# Altium PCB PCB.PcbDoc
Units mm, origin at the board's own origin, x right, y up, seen from the top; angles counter-clockwise.
Board outline 48.53 x 25.4 mm, 2 copper layers (Top, Bottom), stack 1.57 mm thick; 45 components, 44 nets, 183 pads, 5 vias.
Unrouted connection lines stored in the file: 116.
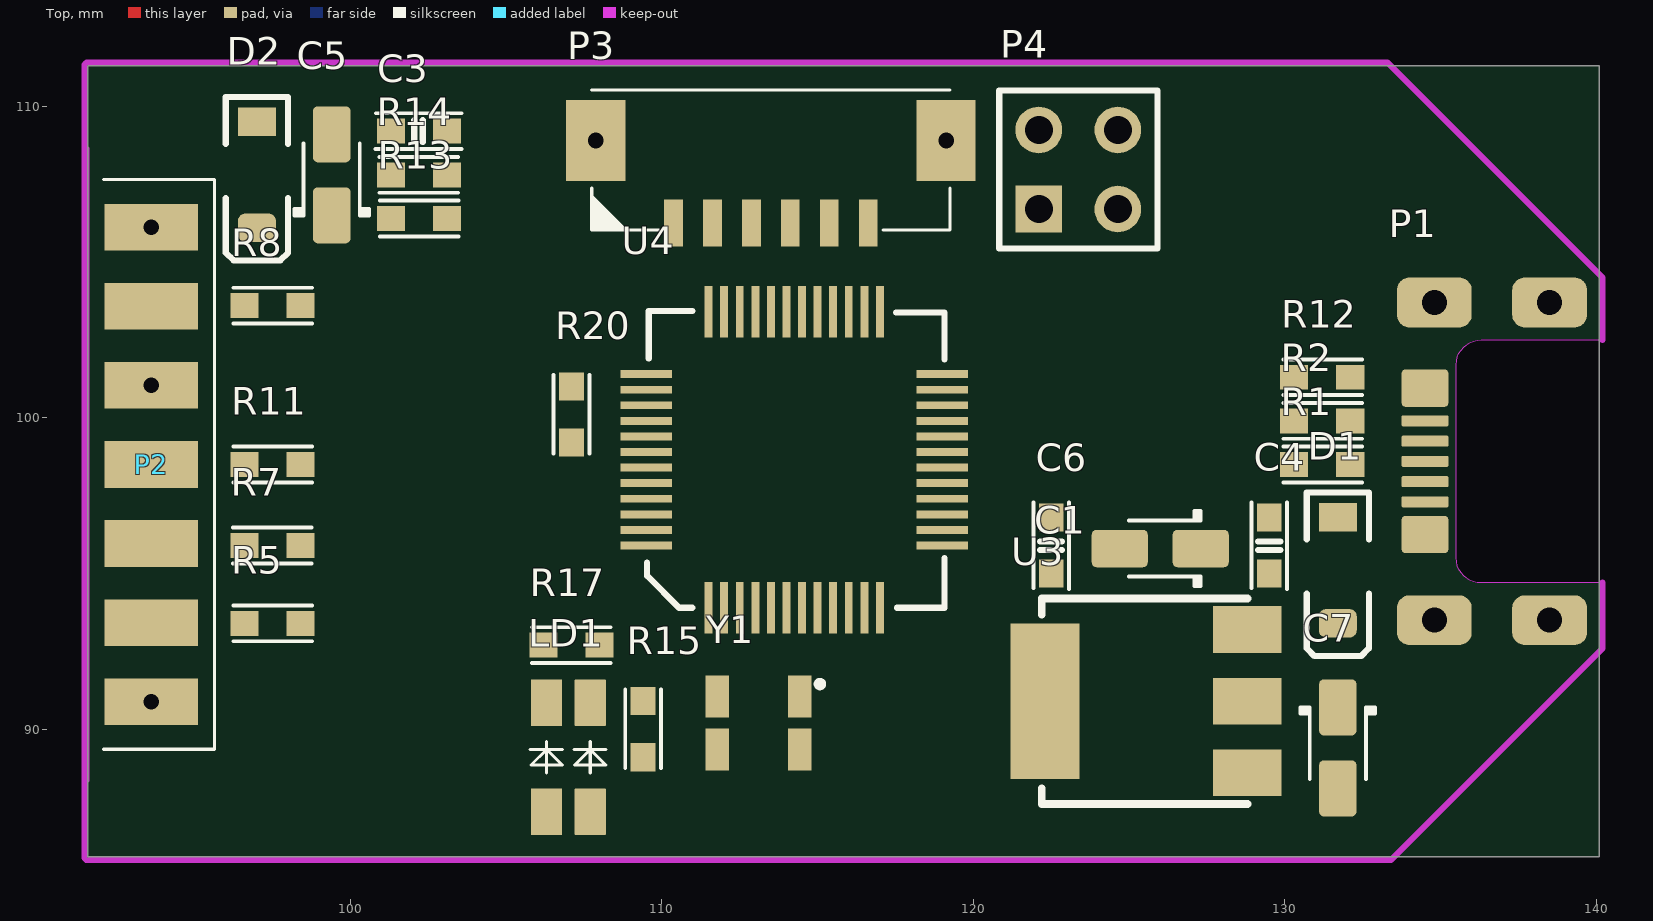
[diagram p0: Top view]
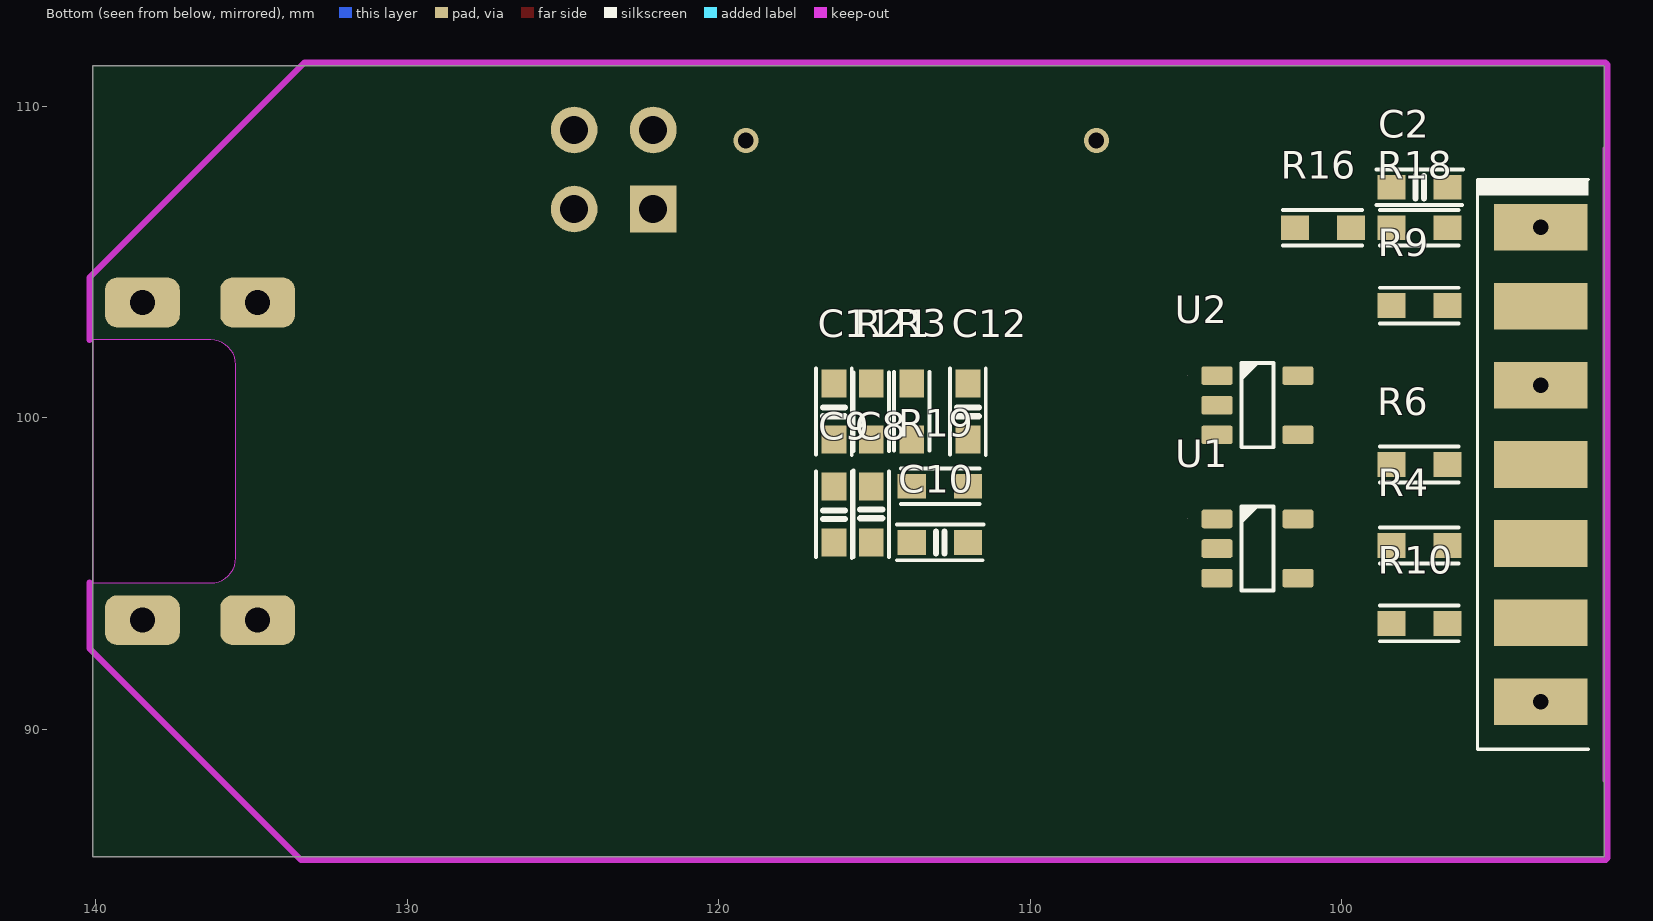
[diagram p1: Bottom view, seen from below]

## Layer stack, top to bottom
Top Solder: solder mask 0.01, Solder Resist, Dk 3.5
Top: signal copper 0.035
Dielectric 1: dielectric 1.5, FR-4, Dk 4.8
Bottom: signal copper 0.035
Bottom Solder: solder mask 0.01, Solder Resist, Dk 3.5

## Board outline
91.568,85.9 91.568,111.3 140.1,111.3 140.1,85.9

## Design rules (kind name [scope] priority, off if disabled: settings)
Clearance [All] p1: gap=0.2
FanoutControl Fanout_BGA [IsBGA] p1: bgadir=Out bgaviamode=Centered fanoutstyle=Auto fanoutdirection=InOnly viagrid=0.025 // Fanout_BGA (Default Rule)
PolygonConnect [All] p1: connectstyle=Relief reliefconductorwidth=0.254 reliefentries=4 polygonreliefangle="90 Angle" airgapwidth=0.254
RoutingVias [All] p1: holewidth=0.7 width=1.27 viastyle="Through Hole" minholewidth=0.3 minwidth=0.8 maxholewidth=0.5 maxwidth=1
SolderMaskExpansion [All] p1: expansion=0.102
Width [All] p1: maxlimit=0.4 minlimit=0.2 preferedwidth=0.3
29 further rules are at their usual default settings.

## Components (designator, comment, footprint, x,y, rotation, side; value= is the part's Value field where it differs from the comment)
C1 "22u" CAPMP3216X180N 126,95.8 r180 top
C2 "0u1" C0603C 98.4,107.4 r180 bottom
C3 "0u1" C0603C 103.1,109.2 r180 top
C4 "0u1" C0603C 129.5,96.8 r270 top
C5 "22u" CAPMP3216X180N 99.4,107.8 r90 top
C6 "0u1" C0603C 122.5,96.8 r270 top
C7 "22u" CAPMP3216X180N 131.7,89.4 r270 top
C8 "0u1" C0603C 115.1,96 r90 bottom
C9 "0u1" C0603C 116.3,97.8 r270 bottom
C10 "0u1" C0603C 113.8,96 r180 bottom
C11 "0u1" C0603C 116.3,101.1 r270 bottom
C12 "0u1" C0603C 112,101.1 r270 bottom
D1 "MBR0520" SOD-123 131.7,95.1 r270 top
D2 "MBR0520" SOD-123 97,107.8 r270 top
LD1 "FYLS-1210 EGW" FYLS-1210 107,89.1 r90 top
P1 "47346-0001" USB_Micro-B_FCI_SMD 140.1,98.6 r90 top
P2 "Header 7X2" IDC-14MS-EDGE 93.6,98.5 r270 top
P3 "Header 6" CONN-1.25MM6P 113.5,108.9 r0 top
P4 "Header 4" HDR2X2 122.1,106.7 r90 top
R1 "22R" C0603R 132.1,98.5 r180 top
R2 "22R" C0603R 132.1,99.9 r180 top
R3 "10R" C0603R 113.8,101.1 r270 bottom
R4 "22R" C0603R 98.4,95.9 r180 bottom
R5 "22R" C0603R 98.4,93.4 r180 top
R6 "22R" C0603R 98.4,98.5 r180 bottom
R7 "22R" C0603R 96.6,95.9 r0 top
R8 "22R" C0603R 98.4,103.6 r180 top
R9 "22R" C0603R 98.4,103.6 r180 bottom
R10 "22R" C0603R 98.4,93.4 r180 bottom
R11 "22R" C0603R 98.4,98.5 r180 top
R12 "1.5k" C0603R 132.1,101.3 r180 top
R13 "4.7k" C0603R 103.1,106.4 r180 top
R14 "4.7k" C0603R 101.3,107.8 r0 top
R15 "510R" C0603R 109.4,90.9 r270 top
R16 "220R" C0603R 101.5,106.1 r180 bottom
R17 "510R" C0603R 106.2,92.7 r0 top
R18 "680R" C0603R 98.4,106.1 r180 bottom
R19 "100k" C0603R 112,97.8 r0 bottom
R20 "220R" C0603R 107.1,101 r270 top
R21 "220R" C0603R 115.1,99.3 r90 bottom
U1 "ESDA5V3SC5" SOT23-5 102.7,95.8 r180 bottom
U2 "ESDA5V3SC5" SOT23-5 102.7,100.4 r180 bottom
U3 "LM1117-3.3" SOT223 128.8,88.6 r90 top
U4 "STM32F103C8T6" LQFP48 111.5,93.9 r90 top
Y1 "8MHz" DFN170P250X90-4N 113.1,90.2 r270 top

## Footprints (in the part's own frame and the unit in brackets; to place one, negate y for a bottom-side part, rotate by r counter-clockwise, add the part's x,y. Pads: shape width x height; smd on the part's side, far side on the other; paste and mask are expansions set on the pad)
C0603C [mm]
  rect 0.9x0.8 smd: 1(0,0) 2(1.8,0)
  silkscreen extent -0.48,-0.58 2.3,0.58, body extent 0,-0.4 1.6,0.4, height 0.3
C0603R [mm]
  rect 0.9x0.8 smd: 1(0,0) 2(1.8,0)
  silkscreen extent -0.37,-0.58 2.15,0.58, body extent 0,-0.41 1.6,0.41, height 0.45
CAPMP3216X180N [mm] "Capacitor, polarized, Molded Body, EIA 535BAAC size A; 3.20mm L X 1.60mm W X 1.80mm H"
  round 0.508 on Mech15: 0(0,0)
  rrect25% 1.8x1.2 smd: 1(-1.3,0) 2(1.3,0)
  silkscreen extent -1.3,-1.2 1,1.2, body extent -1.6,-0.8 1.6,0.8, height 1.8
CONN-1.25MM6P [mm]
  rect 0.6x1.5 smd: 1(-3.125,-2.65) 2(-1.875,-2.65) 3(-0.625,-2.65) 4(0.625,-2.65) 5(1.875,-2.65) 6(3.125,-2.65)
  rect 1.9x2.6 smd: HT(-5.625,0) HT(5.625,0)
  silkscreen extent -5.75,-2.88 5.75,1.63
DFN170P250X90-4N [mm] "DFN, 4-Leads, Body 3,20x2,50mm, Pitch 1,70mm, IPC Medium Density"
  rect 1.35x0.75 smd: 1(-0.85,1.325) 2(-0.85,-1.325) 3(0.85,-1.325) 4(0.85,1.325)
  silkscreen extent -1.35,1.88 -1.15,2.07, body extent -1.25,-1.6 1.25,1.6, height 0.6
FYLS-1210 [mm] "Generic 1210 Bi-Colour SMT LED"
  rrect5% 1.5x1 smd: 1(-1.75,0.7) 2(1.75,0.7) 3(-1.75,-0.7) 4(1.75,-0.7)
  silkscreen extent -0.5,-1.2 0.5,1.22
HDR2X2 [mm] "Connector; Header; 2x2 Position"
  rect 1.5x1.5 hole 0.9: 1(0,0)
  round 1.5 hole 0.9: 2(2.54,0) 3(0,-2.54) 4(2.54,-2.54)
  silkscreen extent -1.27,-3.81 3.81,1.27, body extent -1.27,-3.79 3.81,1.29, height 8.51
IDC-14MS-EDGE [mm]
  rect 1.5x3 smd far side: 1(-7.62,0) 3(-5.08,0) 5(-2.54,0) 7(0,0) 9(2.54,0) 11(5.08,0) 13(7.62,0)
  rect 1.5x3 smd: 2(-7.62,0) 4(-5.08,0) 6(-2.54,0) 8(0,0) 10(2.54,0) 12(5.08,0) 14(7.62,0)
  Keep-Out Layer lines w0.1: 10.16,-2.032 -10.16,-2.032
  silkscreen extent -9.14,-1.52 9.14,2.03, body extent -12.7,-10.72 12.7,1.98, height 3.57
LQFP48 [mm]
  rect 1.65x0.254 smd: 1(0,0) 2(0,-0.5) 3(0,-1) 4(0,-1.5) 5(0,-2) 6(0,-2.5) 7(0,-3) 8(0,-3.5) 9(0,-4) 10(0,-4.5) 11(0,-5) 12(0,-5.5) 25(9.5,-5.5) 26(9.5,-5) 27(9.5,-4.5) 28(9.5,-4) 29(9.5,-3.5) 30(9.5,-3) 31(9.5,-2.5) 32(9.5,-2) 33(9.5,-1.5) 34(9.5,-1) 35(9.5,-0.5) 36(9.5,0)
  rect 0.254x1.65 smd: 13(2,-7.5) 14(2.5,-7.5) 15(3,-7.5) 16(3.5,-7.5) 17(4,-7.5) 18(4.5,-7.5) 19(5,-7.5) 20(5.5,-7.5) 21(6,-7.5) 22(6.5,-7.5) 23(7,-7.5) 24(7.5,-7.5) 37(7.5,2) 38(7,2) 39(6.5,2) 40(6,2) 41(5.5,2) 42(5,2) 43(4.5,2) 44(4,2) 45(3.5,2) 46(3,2) 47(2.5,2) 48(2,2)
  silkscreen extent 0,-7.58 9.53,1.97, body extent 0.25,-7.26 9.25,1.74, height 1.56
SOD-123 [mm]
  rrect50% 0.91x1.22 smd: 1(1.7,0)
  rect 0.91x1.22 smd: 2(-1.7,0)
  silkscreen extent -2.5,-1 2.75,1, body extent -1.93,-0.9 1.93,0.9, height 1.22
SOT23-5 [mm]
  round 0.5 on Mech15: 0(0,0)
  rrect25% 1x0.6 smd: 1(-1.3,0.95) 2(-1.3,0) 3(-1.3,-0.95) 4(1.3,-0.95) 5(1.3,0.95)
  silkscreen extent -0.51,-1.35 0.51,1.35, body extent -1.4,-1.45 1.4,1.45, height 1.44
SOT223 [mm]
  rect 1.5x2.2 smd: 1(0,0) 2(2.3,0) 3(4.6,0)
  rect 5x2.2 smd: 2(2.3,6.5)
  silkscreen extent -1,0 5.6,6.6, body extent -0.95,-0.2 5.55,6.8, height 1.64
USB_Micro-B_FCI_SMD [mm]
  round 0.508 on Mech15: 0(0,0)
  rrect20% 0.35x1.5 smd: 1(-1.3,5.6) 2(-0.65,5.6) 3(0,5.6) 4(0.65,5.6) 5(1.3,5.6)
  rrect50% 1.6x2.4 hole 0.8: 6(-5.1,1.6) 6(-5.1,5.3) 6(5.1,1.6) 6(5.1,5.3)
  rrect20% 1.2x1.5 smd: 6(-2.35,5.6) 6(2.35,5.6)
  Keep-Out Layer board cut-out: -3.9,0 -3.9,3.797 -3.839,4.103 -3.666,4.362 -3.406,4.536 -3.1,4.597 -3.1,4.597 3.1,4.597 3.406,4.536 3.666,4.362 3.839,4.103 3.9,3.797 3.9,3.797 3.9,0
  body extent -5.35,-21.58 5.35,5.8, height 4.67

## Part data
C1 C5 C7: library part CapPolar22u, "Polarized capacitor 22u*10V"
C2 C3 C4 C6 C8 C9 C10 C11 C12: library part Cap0u1, "Capacitor 0u1"
D1 D2: "Diode MBR0520"
LD1: "*"
P1: "Micro-USB B Receptacle with Flange, Bottom Mount, Surface Mount, Lead-Free"
P2: library part IDC-14MS-EDGE, "Connector IDC-14MS-EDGE"
P3: library part CONN-1.25MM6P, "Connector CONN-1.25MM6P"
P4: library part "Header 2x2", "Connector Header 2x2"
R1 R2 R4 R5 R6 R7 R8 R9 R10 R11: library part "Res-22R-SMD 0603", "Resistor 22R SMD 0603"
R3: library part "Res-10R-SMD 0603", "Resistor 10R SMD 0603"
R12: library part "Res-1.5k-SMD 0603", "Resistor 1.5k SMD 0603"
R13 R14: library part "Res-4.7k-SMD 0603", "Resistor 4.7k SMD 0603"
R15 R17: library part "Res-510R-SMD 0603", "Resistor 510R SMD 0603"
R16 R20 R21: library part "Res-220R-SMD 0603", "Resistor 220R SMD 0603"
R18: library part "Res-680R-SMD 0603", "Resistor 680R SMD 0603"
R19: library part "Res-100k-SMD 0603", "Resistor 100k SMD 0603"
U1 U2: "Quad Zenner array for ESD protection, 5.3V"
U3: "Voltage Regulators LM1117-3.3"
U4: "Microcontroller STM32F103C8T6"
Y1: library part SMD-3225-8MHz, "Crystal 8MHz"

## Via types
v1: diameter 0.8, hole 0.5, Top to Bottom, 5 vias

## Nets (pads, with @x,y where several pads share a name; then routed paths per layer and width w, separated by ;. In a path a pad name is that pad's centre, name@x,y a point inside that pad or via, vN(x,y) a via of type N, cw(c..) or ccw(c..) an arc to the next point about the centre after c; other vN are vias at no path point)
+3V3: C6.2 C7.1 C9.2 C10.2 C11.1 C12.1 LD1.1 P3.1 P4.3 R12.1 U3.2 U4.1 U4.9 U4.24 U4.36 U4.48 Y1.4
+5V_USB: C1.1 C4.2 D1.1 U3.3
BOOT0: P4.4
BOOT1: R19.1 U4.44
GND: C1.2 C2.1 C3.2 C4.1 C5.2 C6.1 C7.2 C8.2 C9.1 C10.1 C11.2 C12.2 D2.2 LD1.4 P1.4 P1.5 P1.6 P2.5 P2.6 P2.13 P2.14 P3.3 R14.1 R19.2 U1.2 U2.2 U3.1 U4.8 U4.20 U4.23 U4.35 U4.47 Y1.2
  other v1: 93.6,90.88 93.6,101.04
M25_CS: U4.11
NetD1_2: D1.2 P1.1
NetLD1_2: LD1.2 R17.1
NetLD1_3: LD1.3 R15.2
NetP1_2: P1.2 R1.1
NetP1_3: P1.3 R2.1
NetP2_3: P2.3 R9.2
NetP2_4: P2.4 R8.2
NetP2_7: P2.7 R6.2
NetP2_8: P2.8 R11.2
NetP2_9: P2.9 R4.2
NetP2_10: P2.10 R7.2
NetP2_11: P2.11 R10.2
NetP2_12: P2.12 R5.2
NetR20_1: R20.1 U4.41
NetR21_1: R21.1 U4.25
NetU4_5: U4.5 Y1.3
NetU4_6: U4.6 Y1.1
SENS_T_VOL: C3.1 R13.1 R14.2 U4.10
STM_NRST: C8.1 P3.5 U4.7
STM_SWCLK: P3.2 U4.37
STM_SWDIO: P3.4 U4.34
SWIM: R8.1 R16.2 R18.1 U2.1 U4.22 U4.45
SWIM_IN: R16.1 U4.21 U4.43 U4.46
SWIM_RST: R11.1 R20.2 U2.5 U4.42
T_JRST: R5.1 U1.3 U4.19
T_JTCK: R9.1 U2.3 U4.15 U4.26
T_JTDI: R7.1 U1.5 U4.17
T_JTDO: P4.1 R3.2 R10.1 U2.4 U4.16
T_JTMS: R6.1 R21.2 U1.4 U4.27
T_NRST: R4.1 U1.1 U4.18
U1_BL_RX: R3.1 U4.31
U1_BL_TX: P4.2 R15.1 R17.2 U4.30
U2_CK: U4.14
U2_RX: U4.13
U2_TX: U4.12
USB_N: R1.2 U4.32
USB_P: R2.2 R12.2 U4.33
VTG: C2.2 C5.1 D2.1 P2.1 P2.2 R13.2 R18.2
  other v1: 93.6,106.12
pads on no net: C1.0 C5.0 C7.0 P1.0 P3.6 P3.HT U1.0 U2.0 U4.2 U4.3 U4.4 U4.28 U4.29 U4.38 U4.39 U4.40
copper on no net:
  other v1: 107.875,108.9 119.125,108.9

## Keep-outs
Keep-Out Layer:
  lines w0.2: 140.2,94.7 140.2,92.6 133.4,85.8 91.568,85.8 ; 140.2,102.5 140.2,104.5 133.3,111.4 91.568,111.4 ; 91.468,85.9 ccw(c91.568,85.9) 91.568,85.8 ; 91.468,85.9 ccw(c91.568,85.9) 91.568,85.8 ; 91.468,85.9 91.468,111.3 ; 91.468,111.3 cw(c91.568,111.3) 91.568,111.4 ; 91.468,111.3 cw(c91.568,111.3) 91.568,111.4